# EAGLE board Project_Schematic (EAGLE 9.6.2)
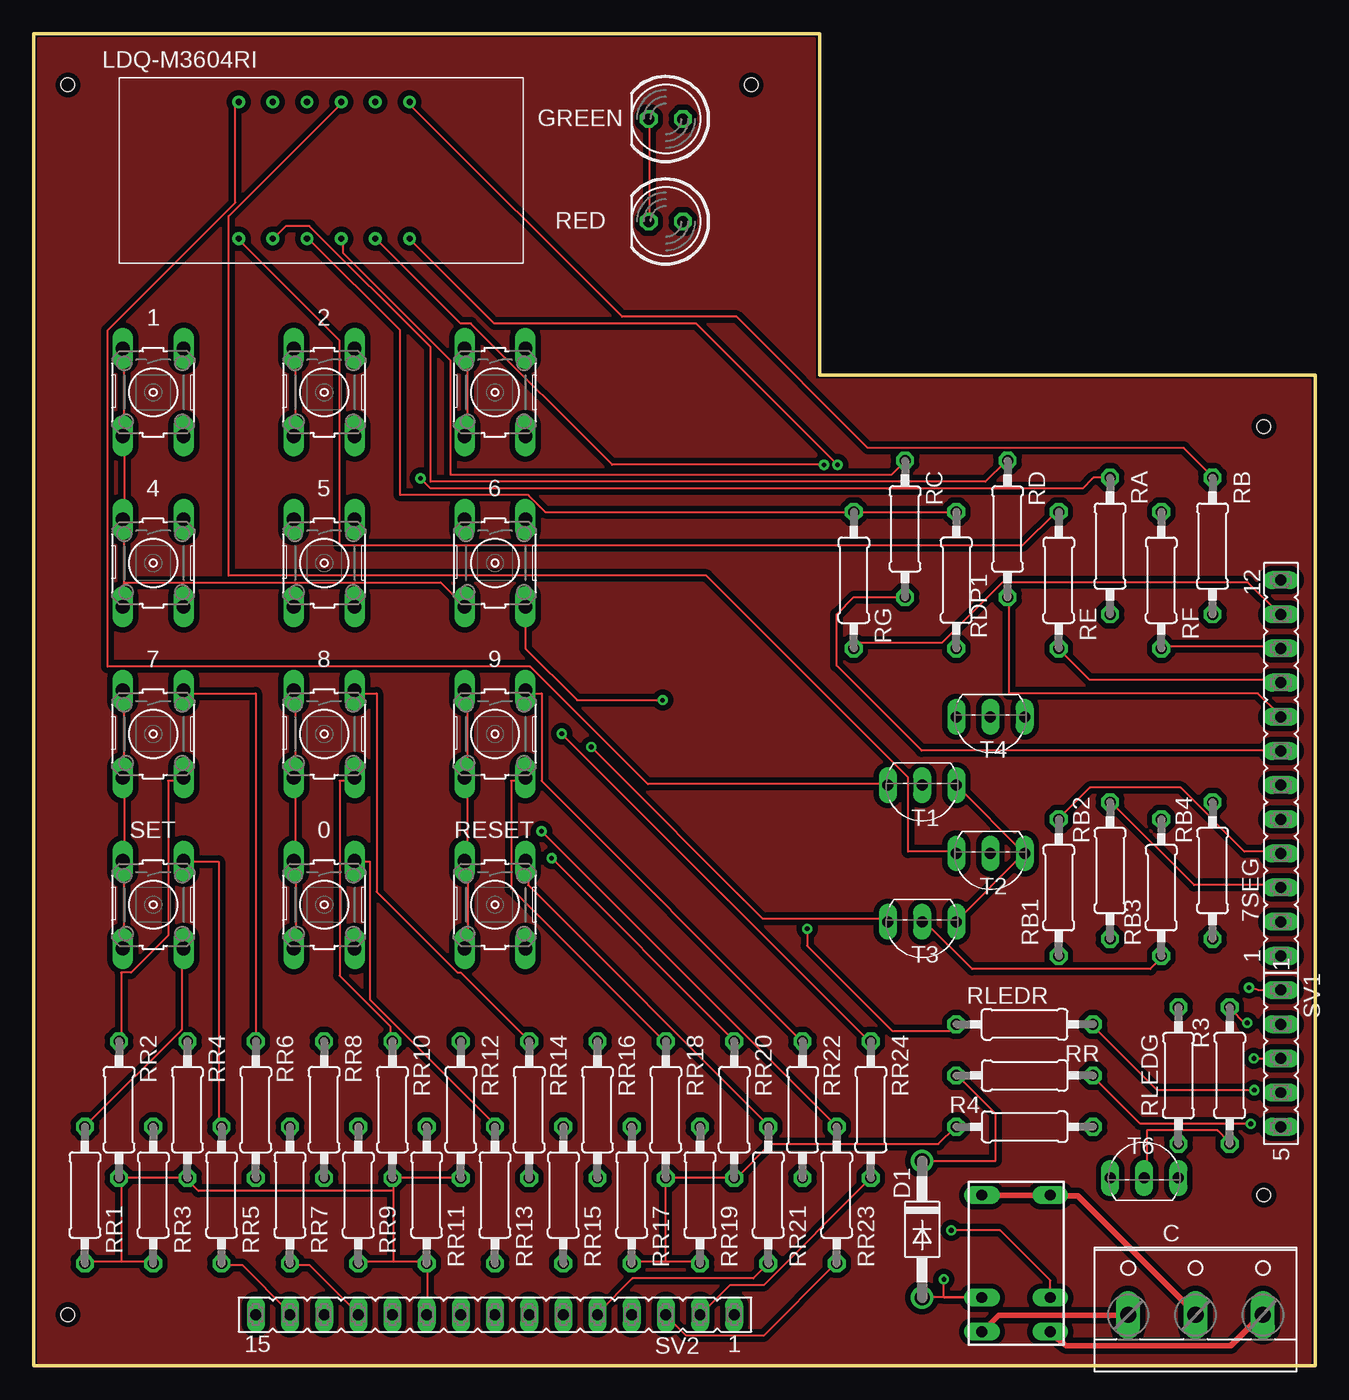
[diagram p0: board, top side]
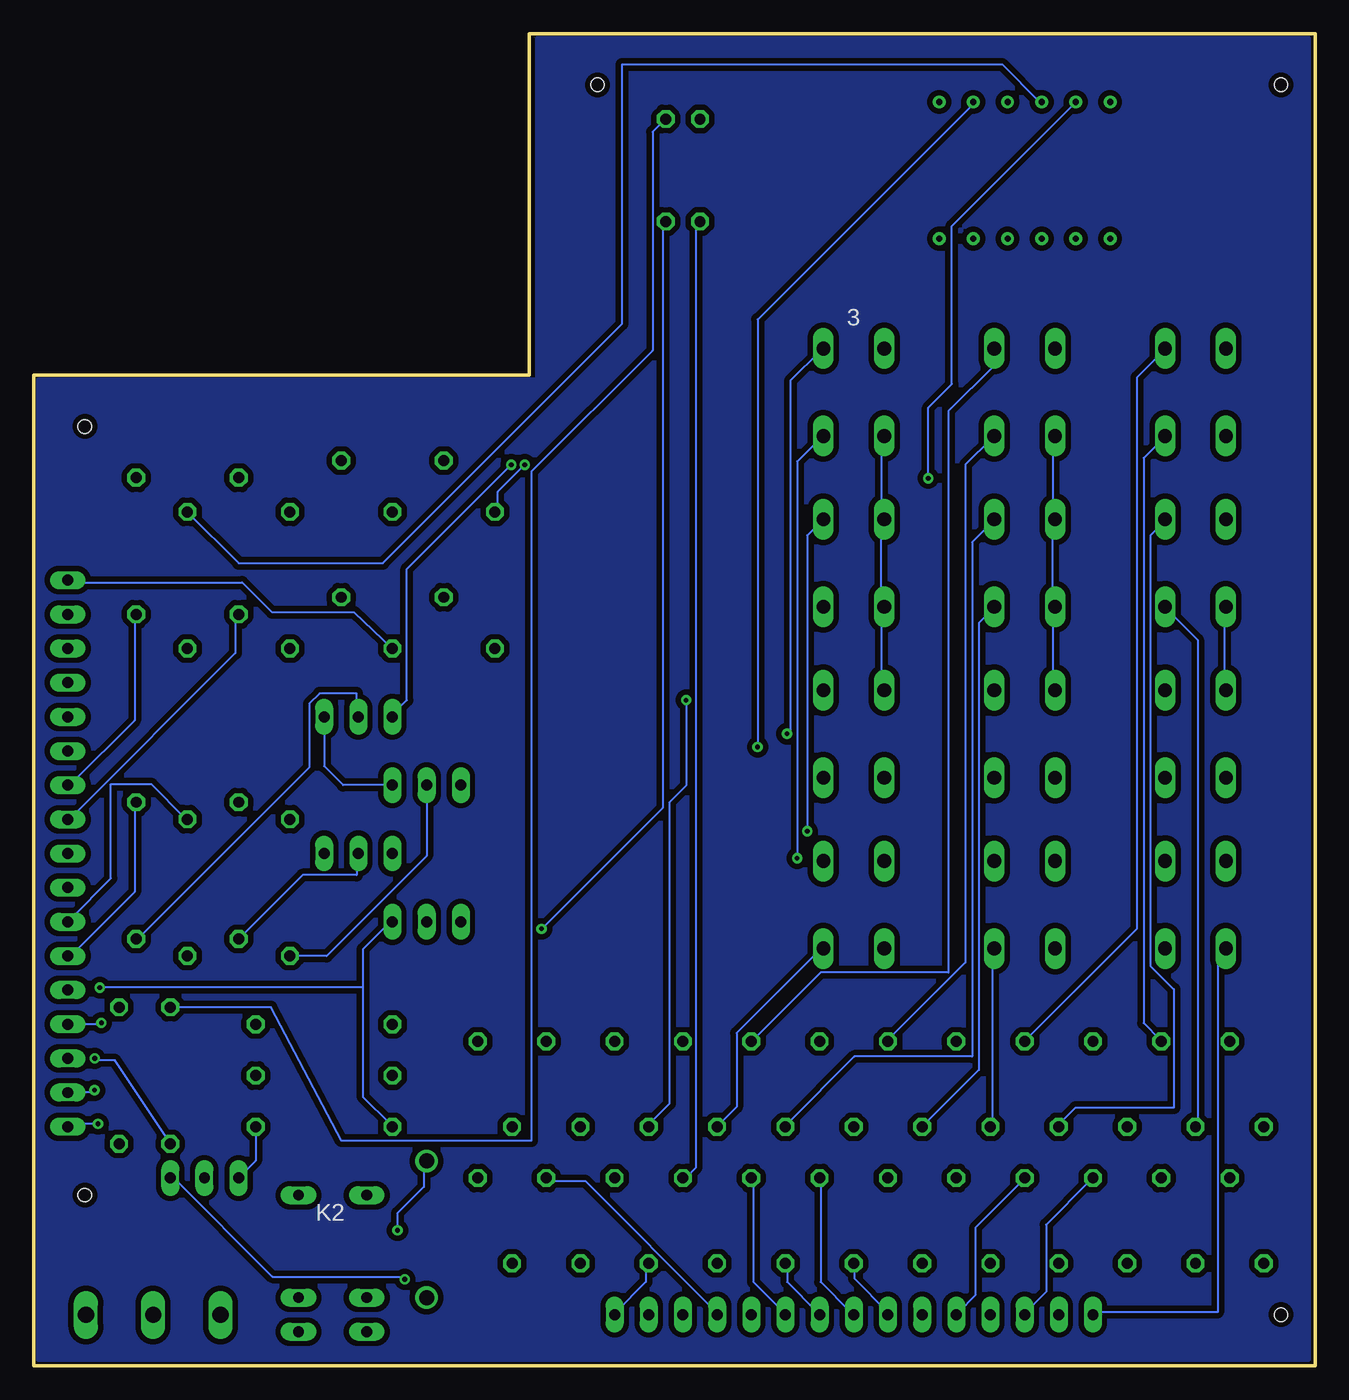
[diagram p1: board, bottom side, seen from below]

Size 95.25 x 99.06 mm. Coordinates in mm from the lower left corner, seen from the top.
Outline: 95.25,73.66 58.42,73.66 58.42,99.06 0,99.06 0,0 95.25,0 95.25,73.66
Copper layers (1*16): Top 0.035mm / dielectric 1.5mm / Bottom 0.035mm
Design rules "default *": minimum track width 6mil, minimum drill 0.35mm, track to track 6mil, track to pad 6mil, pad to pad 6mil, via to via 6mil, smd to smd 6mil, copper to edge 0mil, drill to drill 6mil, minimum pad ring 10mil, minimum via ring 8mil, stop-mask expansion 4mil, vias tented up to drill 0mil, thermal gap 10mil
Holes 1 mm at 2.54,95.25 53.34,95.25 2.54,3.81 91.44,12.7 91.44,69.85

## Footprints (pad centres in the part's own frame; a part is rotated, then mirrored left to right if it is on the bottom)
B3F-10XX = drill 1.016 long: 1 -3.251,2.261; 2 3.251,2.261; 3 -3.251,-2.261; 4 3.251,-2.261
FE12 = drill 0.813 long: 1 -13.97,0; 2 -11.43,0; 3 -8.89,0; 4 -6.35,0; 5 -3.81,0; 6 -1.27,0; 7 1.27,0; 8 3.81,0; 9 6.35,0; 10 8.89,0; 11 11.43,0; 12 13.97,0
W237-103 = drill 1.194 long: 1 -5,-1.29; 2 0,-1.29; 3 5,-1.29
DO41-10 = drill 1.118: A 5.08,0; C -5.08,0
LED5MM = drill 0.813 octagon: A -1.27,0; K 1.27,0
G5V1 = drill 0.813 long: 1 -5.08,-2.54; 2 -2.54,-2.54; 5 5.08,-2.54; 6 5.08,2.54; 9 -2.54,2.54; 10 -5.08,2.54
4X7SCHEM = drill 0.45: A 0,0; B 10.16,0; C 5.08,-10.16; D 0,-10.16; DIG1 -2.54,0; DIG2 5.08,0; DIG3 7.62,0; DIG4 10.16,-10.16; DP1 2.54,-10.16; E -2.54,-10.16; F 2.54,0; G 7.62,-10.16
0207/10 = drill 0.813 octagon: 1 -5.08,0; 2 5.08,0
FE05-1 = drill 0.813 long: 1 -5.08,0; 2 -2.54,0; 3 0,0; 4 2.54,0; 5 5.08,0
FE15 = drill 0.813 long: 1 -17.78,0; 2 -15.24,0; 3 -12.7,0; 4 -10.16,0; 5 -7.62,0; 6 -5.08,0; 7 -2.54,0; 8 0,0; 9 2.54,0; 10 5.08,0; 11 7.62,0; 12 10.16,0; 13 12.7,0; 14 15.24,0; 15 17.78,0
TO92-EBC = drill 0.813 long: B 0,-1.27; C 2.54,-1.27; E -2.54,-1.27

## Placement (x,y rotation side)
0  [B3F-10XX]  21.59,34.29 270 top
1  [B3F-10XX]  8.89,72.39 270 top
2  [B3F-10XX]  21.59,72.39 270 top
3  [B3F-10XX]  34.29,72.39 270 top
4  [B3F-10XX]  8.89,59.69 270 top
5  [B3F-10XX]  21.59,59.69 270 top
6  [B3F-10XX]  34.29,59.69 270 top
7  [B3F-10XX]  8.89,46.99 270 top
7SEG  [FE12]  92.71,44.45 90 top
8  [B3F-10XX]  21.59,46.99 270 top
9  [B3F-10XX]  34.29,46.99 270 top
C  [W237-103]  86.36,5.08 0 top
D1  1N4004  [DO41-10]  66.04,10.16 270 top
GREEN  [LED5MM]  46.99,92.71 180 top
K2  G5V1  [G5V1]  73.03,7.62 90 top
LDQ-M3604RI  4X7SEGMENTDISPLAY.  [4X7SCHEM]  17.78,93.98 0 top
R3  12k  [0207/10]  88.9,21.59 90 top
R4  10  [0207/10]  73.66,17.78 180 top
RA  47  [0207/10]  80.01,60.96 270 top
RB  47  [0207/10]  87.63,60.96 270 top
RB1  3k9  [0207/10]  76.2,35.56 90 top
RB2  3k9  [0207/10]  80.01,36.83 90 top
RB3  3k9  [0207/10]  83.82,35.56 90 top
RB4  3k9  [0207/10]  87.63,36.83 90 top
RC  47  [0207/10]  64.77,62.23 270 top
RD  47  [0207/10]  72.39,62.23 270 top
RDP1  47  [0207/10]  68.58,58.42 90 top
RE  47  [0207/10]  76.2,58.42 270 top
RED  [LED5MM]  46.99,85.09 180 top
RESET  [B3F-10XX]  34.29,34.29 270 top
RF  47  [0207/10]  83.82,58.42 270 top
RG  47  [0207/10]  60.96,58.42 270 top
RLEDG  68  [0207/10]  85.09,21.59 90 top
RLEDR  82  [0207/10]  73.66,25.4 0 top
RR  10  [0207/10]  73.66,21.59 180 top
RR1  10k  [0207/10]  3.81,12.7 270 top
RR2  10k  [0207/10]  6.35,19.05 270 top
RR3  10k  [0207/10]  8.89,12.7 270 top
RR4  10k  [0207/10]  11.43,19.05 270 top
RR5  22  [0207/10]  13.97,12.7 270 top
RR6  22  [0207/10]  16.51,19.05 270 top
RR7  22  [0207/10]  19.05,12.7 270 top
RR8  22  [0207/10]  21.59,19.05 270 top
RR9  10k  [0207/10]  24.13,12.7 270 top
RR10  10k  [0207/10]  26.67,19.05 270 top
RR11  10k  [0207/10]  29.21,12.7 270 top
RR12  10k  [0207/10]  31.75,19.05 270 top
RR13  22  [0207/10]  34.29,12.7 270 top
RR14  22  [0207/10]  36.83,19.05 270 top
RR15  22  [0207/10]  39.37,12.7 270 top
RR16  22  [0207/10]  41.91,19.05 270 top
RR17  10k  [0207/10]  44.45,12.7 270 top
RR18  10k  [0207/10]  46.99,19.05 270 top
RR19  10k  [0207/10]  49.53,12.7 270 top
RR20  10k  [0207/10]  52.07,19.05 270 top
RR21  22  [0207/10]  54.61,12.7 270 top
RR22  22  [0207/10]  57.15,19.05 270 top
RR23  22  [0207/10]  59.69,12.7 270 top
RR24  22  [0207/10]  62.23,19.05 270 top
SET  [B3F-10XX]  8.89,34.29 270 top
SV1  [FE05-1]  92.71,22.86 270 top
SV2  [FE15]  34.29,3.81 180 top
T1  2N3906  [TO92-EBC]  66.04,41.91 180 top
T2  2N3906  [TO92-EBC]  71.12,36.83 180 top
T3  2N3906  [TO92-EBC]  66.04,31.75 180 top
T4  2N3906  [TO92-EBC]  71.12,46.99 180 top
T6  2N3903  [TO92-EBC]  82.55,15.24 0 top

## Library data of the parts
0 1-9 RESET SET = switch-omron; MPN: B3F-1000; OC_FARNELL: 176432; OC_NEWARK: 36M3542
7SEG SV1 SV2 = con-lsta; OC_FARNELL: unknown; OC_NEWARK: unknown
C = con-wago-500; MPN: 237-103; OC_FARNELL: unknown; OC_NEWARK: 18M7116
D1 = diode
GREEN RED = led
K2 = relay; MPN: G5V-1-DC24; OC_FARNELL: 9949593; OC_NEWARK: 36M6377
LDQ-M3604RI = 4x7seg dispaly LDQ-M3604RI
R3 R4 RA RB RB1-RB4 RC RD RDP1 RE RF RG RLEDG RLEDR RR RR1-RR24 = rcl; SPICEPREFIX: R
T1-T4 T6 = transistor-neu-to92

## Nets
A11-7: RR7.2 SV2.12
A18-8: RR15.2 SV2.7
B18-5: RR14.2 SV2.8
C15-E: 7SEG.9 RE.2
D3-6: RR22.2 SV2.4
D4-3: RR21.2 SV2.5
D12-SET: RR8.2 SV2.11
D13-2: RR13.2 SV2.9
D15-F: 7SEG.10 RF.2
E2-RESET: RR24.2 SV2.2
E15-DP1: 7SEG.12 RDP1.1
E16-G: 7SEG.11 RG.2
F4-9: RR23.2 SV2.3
GND: GREEN.K R4.2 RED.K RR17.2 RR18.2 RR19.2 RR20.2 SV1.1 SV2.1 T1.E T2.E T3.E T4.E
J15-A: 7SEG.5 RA.2
J17-D: 7SEG.8 RD.2
J18-C: 7SEG.7
K15-B: 7SEG.6 RB.2
K16-0: RR16.2 SV2.6
N$1: RB1.1 T1.B
N$2: LDQ-M3604RI.DIG2 T2.C
N$3: LDQ-M3604RI.DIG1 T1.C
N$4: LDQ-M3604RI.DIG3 T3.C
N$5: LDQ-M3604RI.DIG4 T4.C
N$6: RB2.1 T2.B
N$7: RB3.1 T3.B
N$8: RB4.1 T4.B
N$10: RR1.2 RR2.2 RR3.2 RR4.2 RR9.2 RR10.2 RR11.2 RR12.2 SV2.10
N$11: LDQ-M3604RI.A RA.1
N$12: LDQ-M3604RI.B RB.1
N$13: LDQ-M3604RI.C RC.1
N$14: LDQ-M3604RI.D RD.1
N$15: LDQ-M3604RI.E RE.1
N$16: LDQ-M3604RI.F RF.1
N$17: LDQ-M3604RI.G RG.1
N$18: LDQ-M3604RI.DP1 RDP1.2
N$20: RR5.1 SET.1
N$21: 7.1 RR6.1
N$22: RR5.2 SV2.14
N$23: 1.1 RR8.1
N$24: D1.C K2.2 RR.2
N$25: 0.1 RR13.1
N$26: 8.1 RR14.1
N$27: 2.1 RR16.1
N$28: 8.2 RR10.1
N$29: 5.2 RR11.1
N$30: R3.1 T6.B
N$31: R4.1 T6.E
N$32: 2.2 RR12.1
N$33: 0.2 RR9.1
N$34: 5.1 RR15.1
N$36: K2.5
N$39: GREEN.A RLEDG.2
N$40: RED.A RLEDR.1
N$42: RR1.1 SET.2
N$43: 7.2 RR2.1
N$44: 4.2 RR3.1
N$45: 1.2 RR4.1
N$46: 4.1 RR7.1
N$48: K2.9 T6.C
N$49: RR6.2 SV2.13
N$54: 0.3 0.4 2.3 2.4 5.3 5.4 8.3 8.4
N$55: RESET.1 RR21.1
N$56: 9.1 RR22.1
N$57: 3.1 RR24.1
N$58: 9.2 RR18.1
N$59: 6.2 RR19.1
N$60: 3.2 RR20.1
N$61: RESET.2 RR17.1
N$62: 6.1 RR23.1
N$67: 1.3 1.4 3.3 3.4 4.3 4.4 6.3 6.4 7.3 7.4 9.3 9.4 RESET.3 RESET.4 SET.3 SET.4 SV2.15
T13-RELAY: R3.2 SV1.2
U12-DIG1: 7SEG.4 RB1.2
U14-LEDR: RLEDR.2 SV1.4
V10-DIG3: 7SEG.2 RB3.2
V11-DIG4: 7SEG.1 RB4.2
V12-DIG2: 7SEG.3 RB2.2
V14-LEDG: RLEDG.1 SV1.3
VCC: RR.1 SV1.5

## Tracks (layer width: path | path; a pad name or v marks a point on that pad's centre or on a via)
A11-7
  Top 0.152: SV2.12 24,4 20.5,7.5 19.25,7.5 RR7.2
A18-8
  Bottom 0.152: SV2.7 37,4 39.25,6.25 39.25,7.5 RR15.2
B18-5
  Bottom 0.152: SV2.8 34.5,4 36.75,6.25 36.75,13.75 RR14.2
C15-E
  Top 0.152: RE.2 76.25,53.25 78.5,51 92.5,51 7SEG.9
D3-6
  Bottom 0.152: SV2.4 44.5,4 54.25,13.75 57,13.75 RR22.2
D4-3
  Top 0.152: SV2.5 42,4 44.5,6.5 53.5,6.5 54.5,7.5 RR21.2
D12-SET
  Bottom 0.152: SV2.11 26.5,4 25.25,5.25 25.25,10.25 21.75,13.75 RR8.2
D13-2
  Bottom 0.152: SV2.9 31.75,4 34.25,6.5 34.25,7.5 RR13.2
D15-F
  Top 0.152: RF.2 84,53.5 92.5,53.5 7SEG.10
E2-RESET
  Top 0.152: SV2.2 49.75,4 51.75,6 54.25,6 62,13.75 RR24.2
E15-DP1
  Bottom 0.152: RDP1.1 71.45,56.04 77.54,56.04 79.75,58.25 92.5,58.25 7SEG.12
E16-G
  Top 0.152: RG.2 61,53.5 61.25,53.75 67.5,53.75 72,58.25 90.25,58.25 92.5,56 7SEG.11
F4-9
  Top 0.152: SV2.3 47,3.75 48.5,2.25 54.25,2.25 59.5,7.5 RR23.2
GND  (via drill 0.35)
  Top 0.152: T3.E 68.75,33.25 73.5,38 T2.E 73.5,38.25 68.75,43 T1.E | SV1.1 91,27.94 v90.34,28.13 | RED.K 45.75,85.25 45.75,92.5 GREEN.K | 47,7.75 49.5,7.75 RR19.2 | 47,7.75 44.5,7.75 RR17.2 | 47,7.75 47,13.75 RR18.2 47,14 52,14 RR20.2 52.25,14 54.75,16.5 67.25,16.5 68.5,17.75 R4.2
  Bottom 0.152: 70.77,28.13 70.77,30.98 68.75,33 T3.E | 70.77,28.13 70.77,20.02 68.75,18 R4.2 | 70.77,28.13 v90.34,28.13 | T1.E 72.24,43.18 73.66,44.6 T4.E | SV2.1 52,4 49.75,6.25 49.75,7.5 RR19.2 | RED.K 45.75,85 46,84.75 46,14.75 46.75,14 RR18.2
J15-A
  Bottom 0.152: 7SEG.5 92.5,40.75 80.25,53 80.25,55.75 RA.2
J17-D
  Top 0.152: RD.2 72.5,57 72.5,50 91,50 92.5,48.5 7SEG.8
J18-C
  Top 0.152: 7SEG.7 92.5,45.75 66.01,45.75 59.69,52.07 59.69,55.88 60.96,57.15 64.77,57.15
K15-B
  Bottom 0.152: 7SEG.6 92.5,43.25 87.75,48 87.75,55.75 RB.2
K16-0
  Bottom 0.152: SV2.6 39.5,4 41.75,6.25 41.75,13.75 RR16.2
N$1
  Bottom 0.152: T1.B 66.04,37.92 73.48,30.48 RB1.1
N$2
  Top 0.152: LDQ-M3604RI.DIG2 22.75,93.75 14.5,85.5 14.5,58.75 50,58.75 65,43.75 65,38.25 68.5,38.25 T2.C
N$3
  Top 0.152: LDQ-M3604RI.DIG1 15,93.75 15,86.5 5.5,77 5.5,52 36.9,52 45.65,43.25 63.5,43.25 T1.C
N$4  (via drill 0.35)
  Top 0.152: v41.44,46.02 54.21,33.25 63.5,33.25 T3.C
  Bottom 0.152: v41.44,46.02 41.44,77.81 25.5,93.75 LDQ-M3604RI.DIG3
N$5  (via drill 0.35)
  Top 0.152: v59.75,67 49.25,77.5 34.25,77.5 28,83.75 LDQ-M3604RI.DIG4
  Bottom 0.152: v59.75,67 67.5,59.25 67.5,49.5 68.5,48.5 T4.C
N$6
  Bottom 0.152: RB2.1 75.25,36.5 71.25,36.5 71.25,38 T2.B
N$7
  Top 0.152: T3.B 66.25,33 69.75,29.5 83,29.5 83.75,30.25 RB3.1
N$8
  Bottom 0.152: RB4.1 87.5,31.75 74.75,44.5 74.75,49.25 74,50 71.25,50 71.25,48.5 T4.B
N$9
  pour Top (isolate 0.406): 0.38,98.68 58.04,98.68 58.04,98.42 58.04,73.28 94.87,73.28 94.87,0.25 0.38,0.25
N$10
  Top 0.152: 6.5,7.75 8.75,7.75 RR3.2 | 6.5,7.75 4,7.75 RR1.2 | 6.5,7.75 6.5,13.75 RR2.2 6.5,14 11.25,14 RR4.2 11.5,13.75 12.25,13 26.75,13 | RR12.2 31.75,14 26.75,14 RR10.2 26.75,13.75 26.75,13 | 26.75,7.75 29,7.75 RR11.2 29.25,7.5 29.25,4 SV2.10 | 26.75,7.75 24.25,7.75 RR9.2 | 26.75,7.75 26.75,13
N$11  (via drill 0.35)
  Top 0.152: v28.75,66 29.5,65.25 77.98,65.25 78.77,66.04 RA.1
  Bottom 0.152: v28.75,66 28.75,71.25 27,73 27,84.75 18,93.75 LDQ-M3604RI.A
N$12
  Top 0.152: LDQ-M3604RI.B 28,93.75 43.75,78 52.25,78 62,68.25 85.5,68.25 87.5,66.25 RB.1
N$13
  Top 0.152: LDQ-M3604RI.C 23,83.75 23,82.75 31,74.75 31,66.25 63.75,66.25 64.75,67.25 RC.1
N$14
  Top 0.152: LDQ-M3604RI.D 18,84 18.75,84.75 20.5,84.75 29.5,75.75 29.5,65.75 70.75,65.75 72.25,67.25 RD.1
N$15
  Top 0.152: LDQ-M3604RI.E 15.25,83.75 22.75,76.25 22.75,61 73.5,61 76,63.5 RE.1
N$16
  Bottom 0.152: RF.1 80.01,59.69 69.29,59.69 51.5,77.48 51.5,96.77 23.27,96.77 20.5,94 LDQ-M3604RI.F
N$17  (via drill 0.35)
  Top 0.152: v58.75,67 43,67 32.5,77.5 31.75,77.5 25.5,83.75 LDQ-M3604RI.G
  Bottom 0.152: v58.75,67 60.75,65 60.75,63.5 RG.1
N$18
  Top 0.152: LDQ-M3604RI.DP1 20.5,83.75 27.25,77 27.25,64.75 36.77,64.75 38.02,63.5 RDP1.2
N$19
  Top 0.406: 75.36,12.7 70.48,12.7
N$20
  Top 0.152: RR5.1 13.75,18 13.75,37.5 11.25,37.5 SET.1
N$21
  Top 0.152: RR6.1 16.5,24.25 16.5,50 11.25,50 7.1
N$22
  Top 0.152: SV2.14 19,4 15.5,7.5 14,7.5 RR5.2
N$23
  Bottom 0.152: RR8.1 21.5,24.25 13.25,32.5 13.25,73.5 11.25,75.5 1.1
N$24  (via drill 0.35)
  Top 0.152: K2.2 75.56,6.35 71.84,10.08 v68.21,10.08 | RR.2 68.75,21.5 71.5,18.75 71.5,15.25 66.25,15.25 D1.C
  Bottom 0.152: v68.21,10.08 68.21,11.35 66.25,13.3 66.25,15 D1.C
N$25
  Top 0.152: RR13.1 34.25,18 25,27.25 25,37.5 24,37.5 0.1
N$26
  Top 0.152: RR14.1 36.75,24.25 31.75,29.25 31.5,29.25 25.5,35.25 25.5,50 24,50 8.1
N$27
  Bottom 0.152: 2.1 23.85,74.38 27.25,70.98 27.25,29.25 36.75,29.25 41.75,24.25 RR16.1
N$28
  Top 0.152: RR10.1 26.5,24.25 26.5,25.25 22.75,29 22.75,43.5 23.75,43.5 8.2
N$29
  Bottom 0.152: RR11.1 29,18 25,22 25,55.25 24,56.25 5.2
N$30
  Top 0.152: T6.B 82.75,14 82.75,17.5 88,17.5 88.75,16.75 R3.1
N$31
  Bottom 0.152: T6.E 80,14 78.75,15.25 78.75,17.75 R4.1
N$32
  Bottom 0.152: RR12.1 31.75,24.25 26,30 26,67 24,69 2.2
N$33
  Bottom 0.152: RR9.1 24,18 24,31 0.2
N$34
  Bottom 0.152: RR15.1 39.25,18 34.25,23 25.5,23 25.5,61.25 24,62.75 5.1
N$37
  Top 0.406: 91.25,3.75 89,1.5 76.75,1.5 76.1,2.03 75.56,2.52
N$38
  Top 0.406: 86.5,3.75 77.62,12.63 75.62,12.63
N$39
  Bottom 0.152: RLEDG.2 77.62,26.67 72.37,16.75 58.25,16.75 58.25,66.5 49.25,75.5 49.25,91.75 48.5,92.5 GREEN.A
N$40  (via drill 0.35)
  Top 0.152: RLEDR.1 68.06,24.88 63.85,24.88 57.5,31.23 v57.5,32.5
  Bottom 0.152: v57.5,32.5 48.5,41.5 48.5,85 RED.A
N$41
  Top 0.406: 70.55,2.55 71.74,3.75 81.25,3.75
N$42
  Top 0.152: RR1.1 4,18 11,25 11,31 SET.2
N$43
  Top 0.152: RR2.1 6.5,24.25 6.5,29.25 7.25,29.25 10,32 10,43.5 11,43.5 7.2
N$44
  Bottom 0.152: RR3.1 8.73,17.94 8.73,53.98 11,56.25 4.2
N$45
  Bottom 0.152: RR4.1 11.5,24.25 12.75,25.5 12.75,67.5 11.25,69 1.2
N$46
  Bottom 0.152: RR7.1 19,18 17.81,19.19 10.5,19.19 10.5,28 12.25,29.75 12.25,61.75 11.25,62.75 4.1
N$47
  pour Bottom (isolate 0.406): 0.51,98.68 57.78,98.68 57.78,73.28 94.87,73.28 94.87,0.51 0.51,0.51
N$48  (via drill 0.35)
  Top 0.152: v67.66,6.44 67.66,5.08 K2.9 70.45,5.11 66.06,5.11
  Bottom 0.152: v67.66,6.44 67.86,6.64 77.5,6.64 84.84,13.97 T6.C
N$49
  Bottom 0.152: SV2.13 21.5,4 20,5.5 20,10.5 16.75,13.75 RR6.2
N$54
  Top 0.152: 2.3 19.5,75.5 19.5,69.25 2.4 | 0.4 19.5,31.25 19.5,37.5 0.3 19.5,37.75 19.5,43.5 8.4 19.5,43.75 19.5,50 8.3
  Bottom 0.152: 2.4 19.5,69 19.5,63 5.3 19.5,62.75 19.5,56.5 5.4 19.5,56.25 19.5,50.25 8.3
N$55
  Top 0.152: RR21.1 54.5,18 36.75,35.75 36.75,37.5 RESET.1
N$56
  Top 0.152: RR22.1 57,24.25 37.75,43.5 37.75,50 36.75,50 9.1
N$57  (via drill 0.35)
  Top 0.152: v39.25,47 62,24.25 RR24.1
  Bottom 0.152: v39.25,47 39,47.25 39,73.25 36.75,75.5 3.1
N$58
  Top 0.152: RR18.1 46.75,24.25 35.5,35.5 35.5,43.5 36.5,43.5 9.2
N$59  (via drill 0.35)
  Top 0.152: v46.75,49.5 40.4,49.5 36.55,53.35 6.2
  Bottom 0.152: v46.75,49.5 46.75,43.15 48,41.9 48,19.5 49.5,18 RR19.1
N$60  (via drill 0.35)
  Top 0.152: v38.5,37.75 52,24.25 RR20.1
  Bottom 0.152: v38.5,37.75 38.5,67.25 36.75,69 3.2
N$61
  Bottom 0.152: RR17.1 44.25,18 43,19.25 43,24.75 36.75,31 RESET.2
N$62  (via drill 0.35)
  Top 0.152: v37.75,39.75 59.5,18 RR23.1
  Bottom 0.152: v37.75,39.75 37.75,61.75 36.75,62.75 6.1
N$67
  Top 0.152: 3.3 32.25,75.5 32.25,69.25 3.4 | RESET.4 32.25,31.25 32.25,37.5 RESET.3 32.25,37.75 32.25,43.5 9.4 32.25,43.75 32.25,50 9.3 | 1.3 6.75,75.5 6.75,69.25 1.4 6.75,69 6.75,63 4.3 6.75,62.75 6.75,58.25 | SET.4 6.75,31.25 6.75,37.5 SET.3 6.75,37.75 6.75,43.5 7.4 6.75,43.75 6.75,50 7.3 | 6.75,58.25 6.75,56.5 4.4 | 6.75,58.25 30.25,58.25 32,56.5 6.4
  Bottom 0.152: 3.4 32.25,69 32.25,63 6.3 32.25,62.75 32.25,56.5 6.4 32.25,56.25 32.25,50.25 9.3 | 7.3 6.75,50.25 6.75,56.25 4.4 | SV2.15 16.5,4 7.25,4 7.25,30.5 6.75,31 SET.4
T13-RELAY  (via drill 0.35)
  Top 0.152: v90.21,25.5 90,25.5 89,26.5 R3.2
  Bottom 0.152: SV1.2 90.42,25.4 v90.21,25.5
U12-DIG1
  Top 0.152: RB1.2 76.25,40.75 78.5,43 85.25,43 90,38.25 92.5,38.25 7SEG.4
U14-LEDR  (via drill 0.35)
  Top 0.152: v90.72,20.5 83.5,20.5 78.75,25.25 RLEDR.2
  Bottom 0.152: SV1.4 90.93,20.32 v90.72,20.5
V10-DIG3
  Bottom 0.152: RB3.2 84,40.75 86.5,43.25 89.5,43.25 89.5,36.25 92.5,33.25 7SEG.2
V11-DIG4
  Bottom 0.152: 7SEG.1 92.5,30.5 87.75,35.25 87.75,41.75 RB4.2
V12-DIG2
  Top 0.152: RB2.2 80.25,41.75 86.25,35.75 92.5,35.75 7SEG.3
V14-LEDG  (via drill 0.35)
  Top 0.152: v90.7,22.86 SV1.3
  Bottom 0.152: RLEDG.1 89.25,22.75 90.62,22.75 v90.7,22.86
VCC  (via drill 0.35)
  Top 0.152: v90.47,18 82.25,18 78.75,21.5 RR.1
  Bottom 0.152: v90.47,18 90.47,17.91 90.6,18.03 92.46,18.03 SV1.5